# Altium PCB PCB2.PcbDoc
Units mm, origin at the board's own origin, x right, y up, seen from the top; angles counter-clockwise.
Board outline 129.79 x 56.72 mm, 2 copper layers (Top Layer, Bottom Layer); 32 components, 41 nets, 150 pads, 0 vias.
Unrouted connection lines stored in the file: 3.
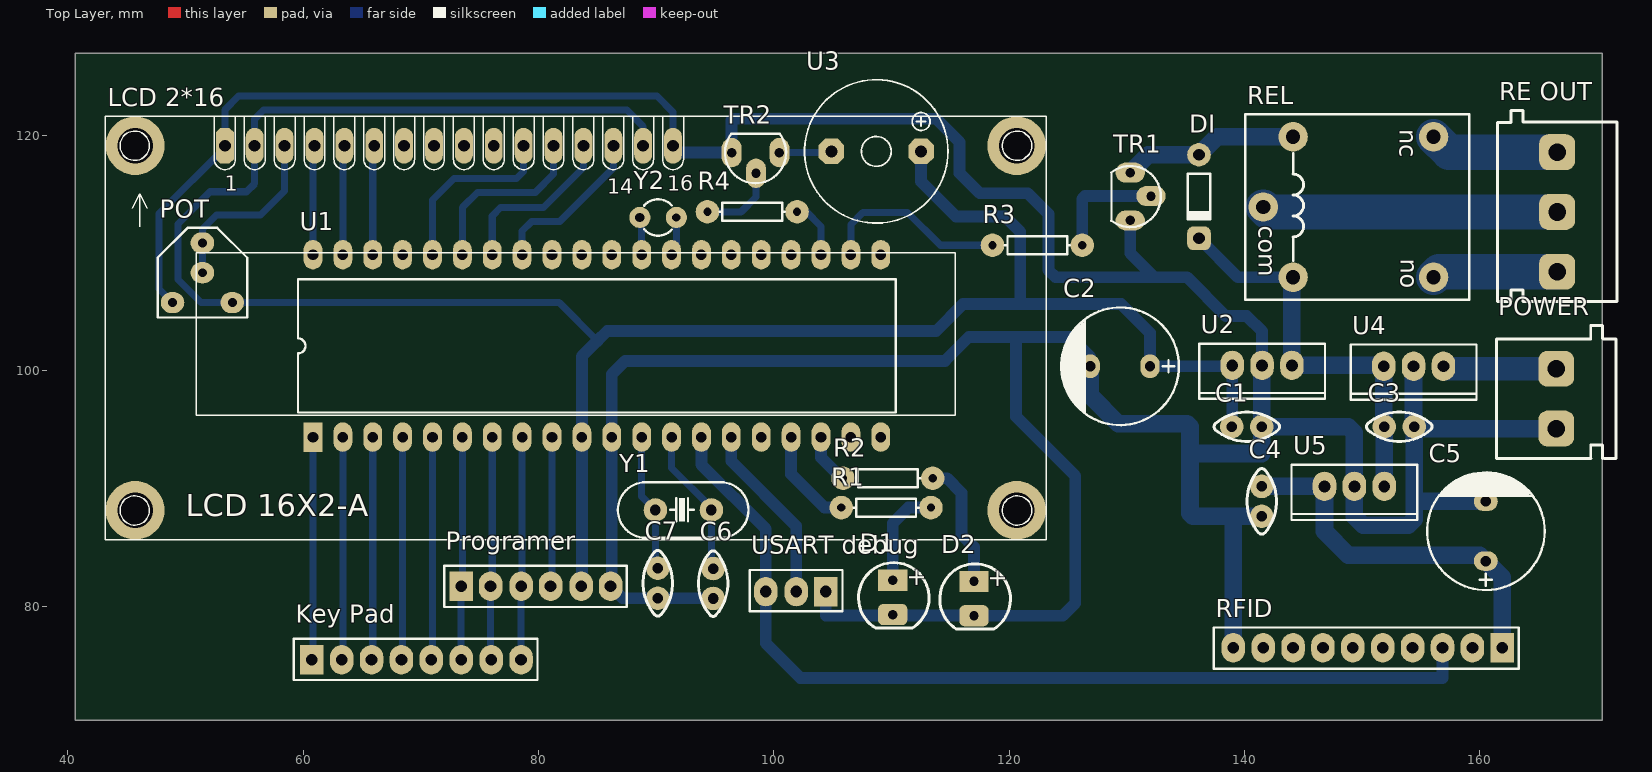
[diagram p0: Top Layer view]
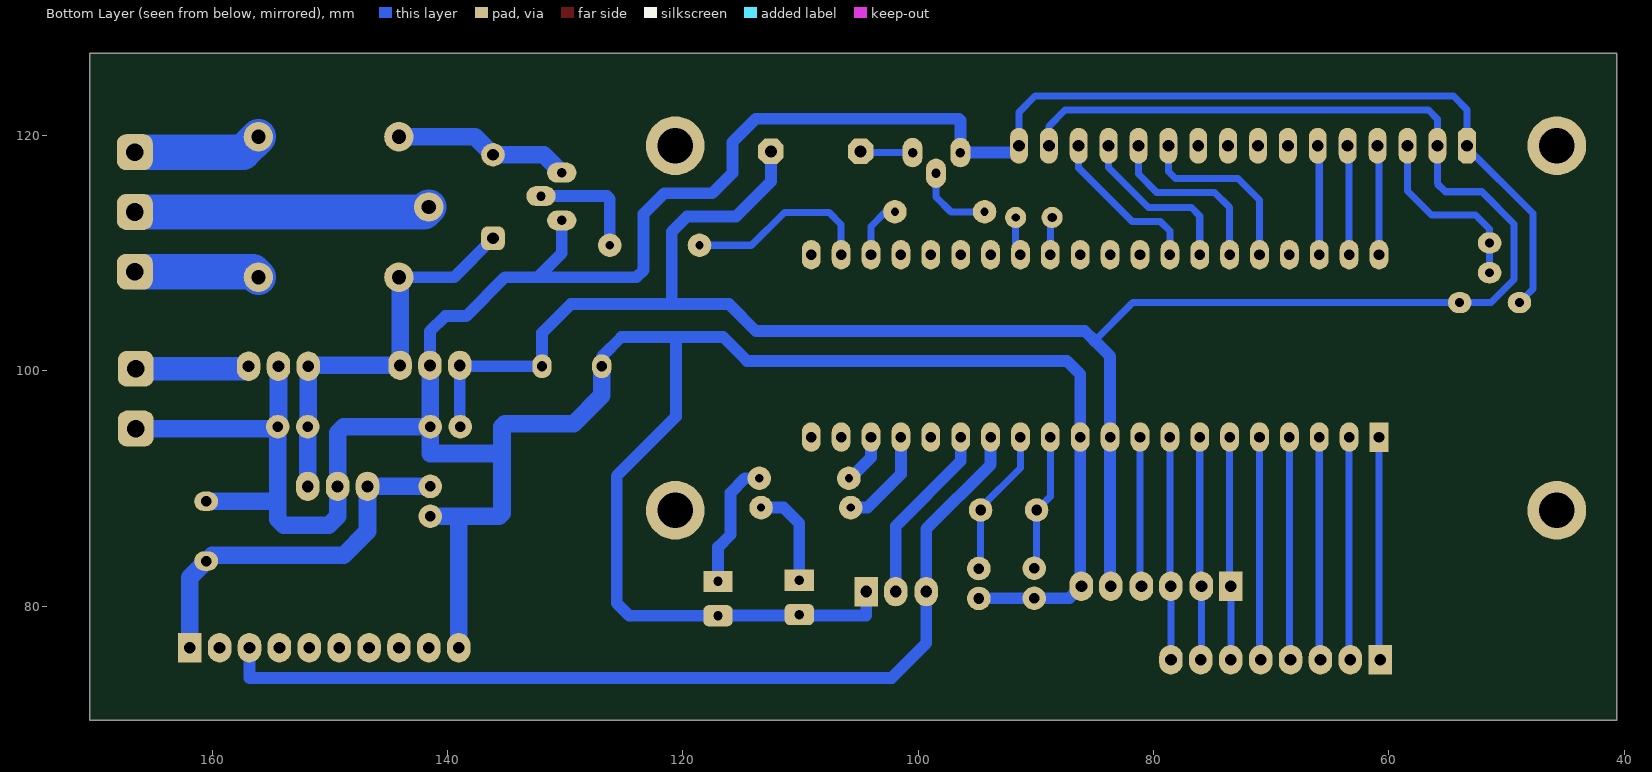
[diagram p1: Bottom Layer view, seen from below]

## Layer stack, top to bottom
Top Solder: solder mask 0.0102, Solder Resist, Dk 3.5
Top Layer: signal copper 0.0356
Dielectric 1: dielectric 0.32, FR-4, Dk 4.8
Bottom Layer: signal copper 0.0356
Bottom Solder: solder mask 0.0102, Solder Resist, Dk 3.5

## Board outline
40.615,70.282 170.409,70.282 170.409,127 40.615,127

## Design rules (kind name [scope] priority, off if disabled: settings)
Clearance [All] p1: gap=0.254
PolygonConnect [All] p1: connectstyle=Relief reliefconductorwidth=0.254 reliefentries=4 polygonreliefangle="90 Angle" airgapwidth=0.254
RoutingVias [All] p1: holewidth=0.9 width=1.8 viastyle="Through Hole" minholewidth=0.9 minwidth=1.8 maxholewidth=0.9 maxwidth=1.8
SolderMaskExpansion [All] p1: expansion=0.102
Width [All] p1: maxlimit=5 minlimit=0.6 preferedwidth=0.7
29 further rules are at their usual default settings.

## Components (designator, comment, footprint, x,y, rotation, side; value= is the part's Value field where it differs from the comment)
C1 "100nF" "Cap - 100nF" 140.208,95.25 r0 top
C2 "470uF" "cap 04" 129.438,100.381 r0 top
C3 "100nF" "Cap - 100nF" 153.162,95.25 r0 top
C4 "100nF" "Cap - 100nF" 141.478,88.9 r270 top
C5 "470uF" "cap 04" 160.528,86.36 r270 top
C6 "22pf" "Cap - 100nF" 94.844,81.915 r270 top
C7 "22pf" "Cap - 100nF" 90.145,81.94 r270 top
D1 "LED 5mm" LED-1 110.109,80.797 r0 top
D2 "LED 5mm" LED-1 117.018,80.696 r0 top
DI "1N4148" DO-35 136.144,114.808 r270 top
"Key Pad" "Pin Header" SIP8 60.731,75.438 r180 top
"LCD 2*16" "LCD 16X2" "My_LCD 16x2-A" 53.34,119.126 r0 top
POT "5K" POT-4 51.435,105.791 r0 top
POWER "CON2 pin blue" My_CN2 171.602,102.692 r270 top
Programer "Pin Header" SIP6 73.431,81.686 r180 top
R1 "330" AXIAL-0.3 105.74,88.367 r0 top
R2 "330" AXIAL-0.3 105.893,90.856 r0 top
R3 "330" AXIAL-0.3 118.593,110.668 r0 top
R4 "330" AXIAL-0.3 101.981,113.513 r180 top
"RE OUT" "CON3 pin Green" My_CN3 171.679,121.107 r270 top
REL "Relay" RELAY-1 141.605,113.919 r270 top
RFID "Pin Header" SIP10 161.925,76.454 r0 top
TR1 "BC337" TO-92-1 130.302,114.808 r0 top
TR2 "BC337" TO-92-1 98.45,118.542 r270 top
U1 "ATmega16_PDIP" DIP40 60.833,94.361 r0 top
U2 "7805" TO-220 141.503,100.457 r180 top
U3 "Buzzer small" My_Buzzer 108.712,118.643 r0 top
U4 "7812" TO-220 154.381,100.381 r180 top
U5 "7805" TO-220 149.352,90.17 r180 top
"USART debug" "Pin Header" SIP3 104.419,81.229 r0 top
Y1 "8mhz" XTAL 89.941,88.163 r0 top
Y2 "32.768KHZ" R38 90.17,113.03 r270 top

## Footprints (in the part's own frame and the unit in brackets; to place one, negate y for a bottom-side part, rotate by r counter-clockwise, add the part's x,y. Pads: shape width x height; smd on the part's side, far side on the other; paste and mask are expansions set on the pad)
AXIAL-0.3 [mm]
  round 2 hole 0.7: 1(0,0) 2(7.62,0)
  silkscreen extent 1.04,-0.76 6.58,0.76
"cap 04" [mil]
  oval 65x80 hole 35: 1(100,0) 2(-100,0)
  silkscreen extent -197,-197 197,197, body extent -198,-197 198,199, height 513
"Cap - 100nF" [mm]
  round 2 hole 0.9: 1(-1.27,0) 2(1.27,0)
  silkscreen extent -2.78,-1.25 2.79,1.25, body extent -2.92,-0.86 2.92,0.83, height 6.92
DIP40 [mm]
  rect 1.6x2.5 hole 0.9: 1(0,0)
  oval 1.6x2.5 hole 0.9: 2(2.54,0) 3(5.08,0) 4(7.62,0) 5(10.16,0) 6(12.7,0) 7(15.24,0) 8(17.78,0) 9(20.32,0) 10(22.86,0) 11(25.4,0) 12(27.94,0) 13(30.48,0) 14(33.02,0) 15(35.56,0) 16(38.1,0) 17(40.64,0) 18(43.18,0) 19(45.72,0) 20(48.26,0) 21(48.26,15.5) 22(45.72,15.5) 23(43.18,15.5) 24(40.64,15.5) 25(38.1,15.5) 26(35.56,15.5) 27(33.02,15.5) 28(30.48,15.5) 29(27.94,15.5) 30(25.4,15.5) 31(22.86,15.5) 32(20.32,15.5) 33(17.78,15.5) 34(15.24,15.5) 35(12.7,15.5) 36(10.16,15.5) 37(7.62,15.5) 38(5.08,15.5) 39(2.54,15.5) 40(0,15.5)
  silkscreen extent -1.27,2.08 49.53,13.41
DO-35 [mm] "Diode, Axial; Body 3.8 x 1.9 mm (LxDia. max), Lead Dia. 0.53 mm (max)"
  round 2 hole 1: 1(-3.55,0)
  rrect50% 2x2 hole 1: 2(3.55,0)
  silkscreen extent -1.95,-0.95 2.05,0.95, body extent -3.82,-0.87 3.82,0.87, height 1.89
LED-1 [mm] "LED; 2 Leads"
  rect 2.5x1.8 hole 0.8: 1(0,1.397)
  rrect50% 2.5x1.8 hole 0.8: 2(0,-1.524)
  silkscreen extent -2.91,-2.67 3.09,2.9
My_Buzzer [mil]
  oct 85x85 hole 40: +(150,0) -(-150,0)
  silkscreen extent -240,-240 240,240
My_CN2 [mil]
  rrect50% 120x120 hole 59.06: 1(99.5,-200.5) 2(299.5,-200.5)
  silkscreen extent -45,-400 400,0
My_CN3 [mil]
  rrect50% 120x120 hole 59.06: 1(99.5,-200.5) 2(299.5,-200.5) 3(499.5,-200.5)
  silkscreen extent -40,-400 600,0
"My_LCD 16x2-A" [mil]
  round 196.85 hole 118.11: 0(-300,0) 1(-300,-1220) 2(2650,0) 3(2650,-1220)
  oct 60x120 hole 40: 1(0,0)
  oval 60x120 hole 40: 2(100,0) 3(200,0) 4(300,0) 5(400,0) 6(500,0) 7(600,0) 8(700,0) 9(800,0) 10(900,0) 11(1000,0) 12(1100,0) 13(1200,0) 14(1300,0) 15(1400,0) 16(1500,0)
  silkscreen extent -400,-1319 2750,98
POT-4 [mm]
  oval 2x1.8 hole 0.762 unplated: 1(-2.54,0) 2(0,2.54) 2(0,5.08) 3(2.54,0)
  silkscreen extent -3.81,-1.27 3.81,6.35
R38 [mm] "Crystal, Thru-Hole; 2 Leads; Body 3.1 x 8.2 mm (Dia.xH)"
  round 1.8 hole 0.7: 1(0,1.55)
  round 1.8 hole 0.8: 2(0,-1.55)
  silkscreen extent -1.55,-1.19 1.55,1.17
RELAY-1 [mm]
  round 2.5 hole 1.2 unplated: 1(0,0) 2(-5.969,14.478) 3(5.969,14.478) 4(-5.969,2.54) 5(5.969,2.54)
  silkscreen extent -7.87,-1.52 7.87,17.53
SIP3 [mm]
  rect 2x2.5 hole 1: 1(0,0)
  oval 2x2.5 hole 1: 2(-2.5,0) 3(-5.1,0)
  silkscreen extent -6.47,-1.66 1.43,1.84
SIP6 [mm]
  rect 2x2.5 hole 1: 1(0,0)
  oval 2x2.5 hole 1: 2(-2.5,0) 3(-5.1,0) 4(-7.6,0) 5(-10.2,0) 6(-12.7,0)
  silkscreen extent -14.06,-1.73 1.45,1.77
SIP8 [mm]
  rect 2x2.5 hole 1: 1(0,0)
  oval 2x2.5 hole 1: 2(-2.541,0) 3(-5.082,0) 4(-7.623,0) 5(-10.164,0) 6(-12.705,0) 7(-15.246,0) 8(-17.787,0)
  silkscreen extent -19.19,-1.78 1.53,1.72
SIP10 [mm]
  rect 2x2.5 hole 1: 1(0,0)
  oval 2x2.5 hole 1: 2(-2.541,0) 3(-5.082,0) 4(-7.623,0) 5(-10.164,0) 6(-12.705,0) 7(-15.246,0) 8(-17.787,0) 9(-20.328,0) 10(-22.869,0)
  silkscreen extent -24.51,-1.77 1.4,1.73
TO-92-1 [mm]
  oval 2.5x1.7 hole 0.8 unplated: 1(0,2.032) 2(1.76,0.04) 3(0,-2.032)
  silkscreen extent -1.6,-2.6 2.6,2.6
TO-220 [mm]
  oval 2x2.5 hole 1 unplated: 1(-2.54,0) 2(0,0) 3(2.54,0)
  silkscreen extent -5.35,-1.85 5.35,2.85
XTAL [mm]
  round 2 hole 0.9: 1(0,0) 2(4.76,0)
  silkscreen extent -3.19,-2.36 7.91,2.36, body extent -3.32,-2.38 8.03,2.42, height 13.06

## Part data
C1 C3 C4 C6 C7: library part Cap-Bipolar, "Bipolar Capacitor"
C2 C5: library part Cap-Polar, "Polar Capacitor"
D1 D2: "Typical LED"
DI: library part "Diode 1N4148", "High Conductance Fast Diode"
"Key Pad": library part CON8
"LCD 2*16": "LCD 16X2 Character lcd"
POT: library part POT, "Resistor"
POWER: "Connector blue screw"
Programer: library part CON6
R1 R2 R3 R4: library part Res, "Resistor"
"RE OUT": "Connector green screw"
REL: library part Relay_1
RFID: library part CON10
TR1 TR2: "NPN Transistor"
U1: "8-Bit AVR Microcontroller"
U2 U5: "Reglator"
U3: library part Buzzer, "5-12v small buzzer (12mm)"
U4: library part 7805, "Reglator"
"USART debug": library part CON3
Y1: library part XTAL, "XTAL Crystal"
Y2: library part XTAL, "Crystal Oscillator"

## Nets (pads, with @x,y where several pads share a name; then routed paths per layer and width w, separated by ;. In a path a pad name is that pad's centre, name@x,y a point inside that pad or via, vN(x,y) a via of type N, cw(c..) or ccw(c..) an arc to the next point about the centre after c; other vN are vias at no path point)
BUZZER: R4.1 U1.23 | length 5
  Bottom Layer w0.6: R4.1 102.768,113.513 104.013,112.268 U1.23
GND: "LCD 2*16.1" "LCD 2*16.16" "USART debug.1" C1.2 C2.2 C3.2 C4.2 C5.2 C6.2 C7.2 D1.2 D2.2 POT.1 POWER.2 Programer.6 RFID.10 TR1.3 TR2.3 U1.11 U2.2 U4.2 U5.2 | length 356.3
  Bottom Layer w0.6: POT.1 47.752,106.934 47.752,113.36 53.34,118.948 53.34,119.126 53.34,122.174 54.508,123.342 90.068,123.342 91.44,121.971 91.44,119.126 92.024,118.542
  Bottom Layer w1: 92.024,118.542 TR2.3 96.418,121.285 96.545,121.412 113.817,121.412 115.799,119.431 115.799,116.789 117.5,115.087 121.59,115.087 123.342,113.335 123.342,108.56 123.952,107.95 132.334,107.95 ; C6.2 94.818,80.67 C7.2 87.147,80.67 Programer.6 86.233,81.788 U1.11 86.233,99.695 87.376,100.838 114.554,100.838 116.586,102.87 120.599,102.87 ; 104.419,81.229 104.419,79.197 116.992,79.197 D2.2 124.562,79.172 125.628,80.239 125.628,91.059 120.599,96.088 120.599,102.87 ; C2.2 126.898,101.194 125.222,102.87 120.599,102.87 ; TR1.3 130.302,109.982 132.334,107.95 ; U2.2 141.503,103.353 140.208,104.648 138.43,104.648 135.128,107.95 132.334,107.95
  Bottom Layer w1.5: C2.2 126.898,97.892 129.286,95.504 135.128,95.504 135.382,95.25 135.382,92.964 ; RFID.10 139.056,87.494 139.192,87.63 ; C4.2 139.192,87.63 ; U2.2 141.478,100.432 C1.2 ; U4.2 154.381,95.301 C3.2 ; C5.2 154.432,88.9 ; POWER.2 154.597,95.085 C3.2 ; 135.382,92.964 135.382,87.884 135.636,87.63 139.192,87.63 ; 135.382,92.964 141.478,92.964 C1.2 ; C1.2 148.844,95.25 149.352,94.742 U5.2 149.352,87.63 150.114,86.868 153.924,86.868 154.432,87.376 154.432,88.9 ; 154.432,88.9 C3.2
LED1: R1.1 U1.17 | length 8.6
  Bottom Layer w1: U1.17 101.473,91.211 104.318,88.367 R1.1
LED2: R2.1 U1.18 | length 4.3
  Bottom Layer w1: U1.18 104.013,92.634 105.791,90.856 R2.1
MISO: "Key Pad.7" Programer.2 U1.7 | length 19
  Bottom Layer w0.6: 75.977,75.438 75.931,75.484 Programer.2 76.073,81.828 U1.7
MOSI: "Key Pad.6" Programer.1 U1.6 | length 19
  Bottom Layer w0.6: 73.436,75.438 73.431,75.443 Programer.1 73.533,81.788 U1.6
NetC6_1: C6.1 U1.13 Y1.2 | length 12.6
  Bottom Layer w0.6: U1.13 91.313,91.745 94.701,88.356 Y1.2 94.701,83.327 C6.1
NetC7_1: C7.1 U1.12 Y1.1 | length 11.7
  Bottom Layer w0.6: U1.12 88.773,89.332 Y1.1 89.941,83.414 C7.1
NetD1_1: D1.1 R1.2 | length 8.6
  Bottom Layer w1: D1.1 110.109,87.046 111.43,88.367 R1.2
NetD2_1: D2.1 R2.2 | length 10.9
  Bottom Layer w1: R2.2 114.732,90.856 115.951,89.637 115.951,86.081 117.018,85.014 D2.1
NetDI_1: DI.1 REL.4 TR1.1 | length 15.1
  Bottom Layer w1.5: TR1.1 131.82,118.358 DI.1 137.674,119.888 REL.4
"NetKey Pad_1": "Key Pad.1" U1.1 | length 19
  Bottom Layer w0.6: 60.731,75.438 60.833,75.54 U1.1
"NetKey Pad_2": "Key Pad.2" U1.2 | length 19
  Bottom Layer w0.6: 63.272,75.438 63.373,75.539 U1.2
"NetKey Pad_3": "Key Pad.3" U1.3 | length 19
  Bottom Layer w0.6: 65.813,75.438 65.913,75.538 U1.3
"NetKey Pad_4": "Key Pad.4" U1.4 | length 19
  Bottom Layer w0.6: 68.354,75.438 68.453,75.537 U1.4
"NetKey Pad_5": "Key Pad.5" U1.5 | length 19
  Bottom Layer w0.6: 70.895,75.438 70.993,75.536 U1.5
"NetLCD 2*16_3": "LCD 2*16.3" POT.2 | length 15.9
  Bottom Layer w0.6: POT.2@51.435,108.331 51.435,110.871 51.435,112.039 52.629,113.233 56.388,113.233 58.42,115.265 58.42,119.126
"NetLCD 2*16_4": "LCD 2*16.4" U1.40 | length 9.1
  Bottom Layer w0.6: U1.40 60.833,118.999
"NetLCD 2*16_5": "LCD 2*16.5" U1.39 | length 9.1
  Bottom Layer w0.6: U1.39 63.373,118.999
"NetLCD 2*16_6": "LCD 2*16.6" U1.38 | length 9.3
  Bottom Layer w0.6: U1.38 65.913,118.999 66.04,119.126
"NetLCD 2*16_11": "LCD 2*16.11" U1.36 | length 15.6
  Bottom Layer w0.6: U1.36 70.993,114.503 72.822,116.332 78.13,116.332 78.74,116.942 78.74,119.126
"NetLCD 2*16_12": "LCD 2*16.12" U1.35 | length 15.4
  Bottom Layer w0.6: U1.35 73.533,113.894 74.803,115.164 79.731,115.164 81.28,116.713 81.28,119.126
"NetLCD 2*16_13": "LCD 2*16.13" U1.34 | length 14.6
  Bottom Layer w0.6: U1.34 76.073,113.157 76.784,113.868 80.416,113.868 83.82,117.272 83.82,119.126
"NetLCD 2*16_14": "LCD 2*16.14" U1.33 | length 13.9
  Bottom Layer w0.6: U1.33 78.613,111.887 79.426,112.7 81.813,112.7 86.36,117.246 86.36,119.126
NetPOWER_1: POWER.1 U4.1 | length 9.7
  Bottom Layer w1: U4.1 U4.1@157.137,100.165
  Bottom Layer w2: U4.1@157.137,100.165 POWER.1
NetR3_2: R3.2 TR1.2 | length 9.9
  Bottom Layer w1: R3.2 126.213,114.609 126.452,114.848 TR1.2
NetR4_2: R4.2 TR2.2 | length 6.7
  Bottom Layer w0.6: R4.2 97.231,113.513 98.49,114.772 TR2.2
NetREL_1: "RE OUT.2" REL.1 | length 25.2
  Bottom Layer w3: REL.1 142.024,113.5 166.586,113.5
NetREL_2: "RE OUT.1" REL.2 | length 11
  Bottom Layer w3: REL.2 157.391,118.58 166.586,118.58
NetREL_3: "RE OUT.3" REL.3 | length 10.7
  Bottom Layer w3: REL.3 156.553,108.42 166.586,108.42
NetTR2_1: TR2.1 U3.- | length 4.5
  Bottom Layer w0.6: TR2.1 104.8,118.542 U3.-
NetU1_28: U1.28 Y2.1 | length 2.8
  Bottom Layer w0.6: U1.28@91.72,110.268 Y2.1
NetU1_29: U1.29 Y2.2 | length 3
  Bottom Layer w0.6: U1.29 Y2.2@88.773,112.877
RST: Programer.4 U1.9 | length 12.7
  Bottom Layer w0.6: Programer.4 81.153,81.808 U1.9
RX: "USART debug.3" RFID.3 U1.14 | length 81.1
  Bottom Layer w1: U1.14 93.853,92.024 99.319,86.558 99.319,81.229 99.319,76.83 102.258,73.891 156.843,73.891 RFID.3
SCK: "Key Pad.8" Programer.3 U1.8 | length 19
  Bottom Layer w0.6: 78.518,75.438 78.531,75.451 Programer.3 78.613,81.768 U1.8
TR: R3.1 U1.22 | length 16.2
  Bottom Layer w0.6: U1.22 106.553,112.446 107.569,113.462 111.379,113.462 114.173,110.668 R3.1
TX: "USART debug.2" U1.15 | length 15.4
  Bottom Layer w1: U1.15 96.393,92.329 101.919,86.803 101.919,81.229
VCC: "LCD 2*16.2" "LCD 2*16.15" C1.1 C2.1 POT.3 Programer.5 U1.10 U2.3 U3.+ | length 196.2
  Bottom Layer w0.6: 85.014,102.54 81.763,105.791 POT.3 51.308,105.791 49.352,107.747 49.352,112.471 52.095,115.214 55.194,115.214 55.88,115.9 55.88,119.126 55.88,121.387 56.642,122.149 87.528,122.149 88.9,120.777 88.9,119.126
  Bottom Layer w1: Programer.5 83.693,81.748 U1.10 83.693,101.219 85.014,102.54 85.852,103.378 113.792,103.378 116.078,105.664 121.056,105.664 ; U3.+ 112.522,116.078 115.494,113.106 119.659,113.106 120.955,111.811 120.955,105.766 121.056,105.664 ; U2.3@138.887,100.381 C2.1 131.978,103.226 129.54,105.664 121.056,105.664 ; C1.1 138.963,95.275 U2.3
VCC2: C4.1 C5.1 RFID.1 U5.3 | length 31.9
  Bottom Layer w1.5: C4.1 U5.3 146.812,86.36 148.844,84.328 160.02,84.328 161.925,82.423 RFID.1
VS: C3.1 DI.2 REL.5 U2.1 U4.3 U5.1 | length 35
  Bottom Layer w1: DI.2 139.452,107.95 REL.5
  Bottom Layer w1.5: REL.5 144.043,107.848 U2.1 151.765,100.457 U4.3 151.841,95.301 C3.1 U5.1
pads on no net: "LCD 2*16.0" "LCD 2*16.7" "LCD 2*16.8" "LCD 2*16.9" "LCD 2*16.10" RFID.2 RFID.4 RFID.5 RFID.6 RFID.7 RFID.8 RFID.9 U1.16 U1.19 U1.20 U1.21 U1.24 U1.25 U1.26 U1.27 U1.30 U1.31 U1.32 U1.37

## Text inside footprints (layer, text, board x,y; h text height)
D1: Top Overlay "+" at 112.776,81.559 h1.52 r90
D2: Top Overlay "+" at 119.685,81.458 h1.52 r90
"LCD 2*16": Top Overlay "14" at 85.852,115.062 h1.27; Top Overlay "1" at 53.34,115.316 h1.27; Top Overlay "16" at 90.932,115.316 h1.27; Top Overlay "LCD 16X2-A" at 50.038,87.63 h1.91
REL: Top Overlay "com" at 141.205,112.319 h1.5 r270; Top Overlay "nc" at 153.205,120.519 h1.5 r270; Top Overlay "no" at 153.305,109.519 h1.5 r270